# Altium PCB ProPrj_HTXStudio_OneHanded_Keyboard.PcbDoc (part 9 of 11)
Units mm, origin at the board's own origin, x right, y up, seen from the top; angles counter-clockwise.
Board outline 152.4 x 101.6 mm, 20 copper layers (F.Cu, F.Mask, B.Cu, B.Mask, In1.Cu, F.SilkS, In2.Cu, B.SilkS, F.Adhes, B.Adhes, F.Paste, B.Paste, Dwgs.User, Cmts.User, Eco1.User, Eco2.User, Edge.Cuts, Margin, B.CrtYd, F.CrtYd); 269 components, 0 nets, 747 pads, 1168 vias.
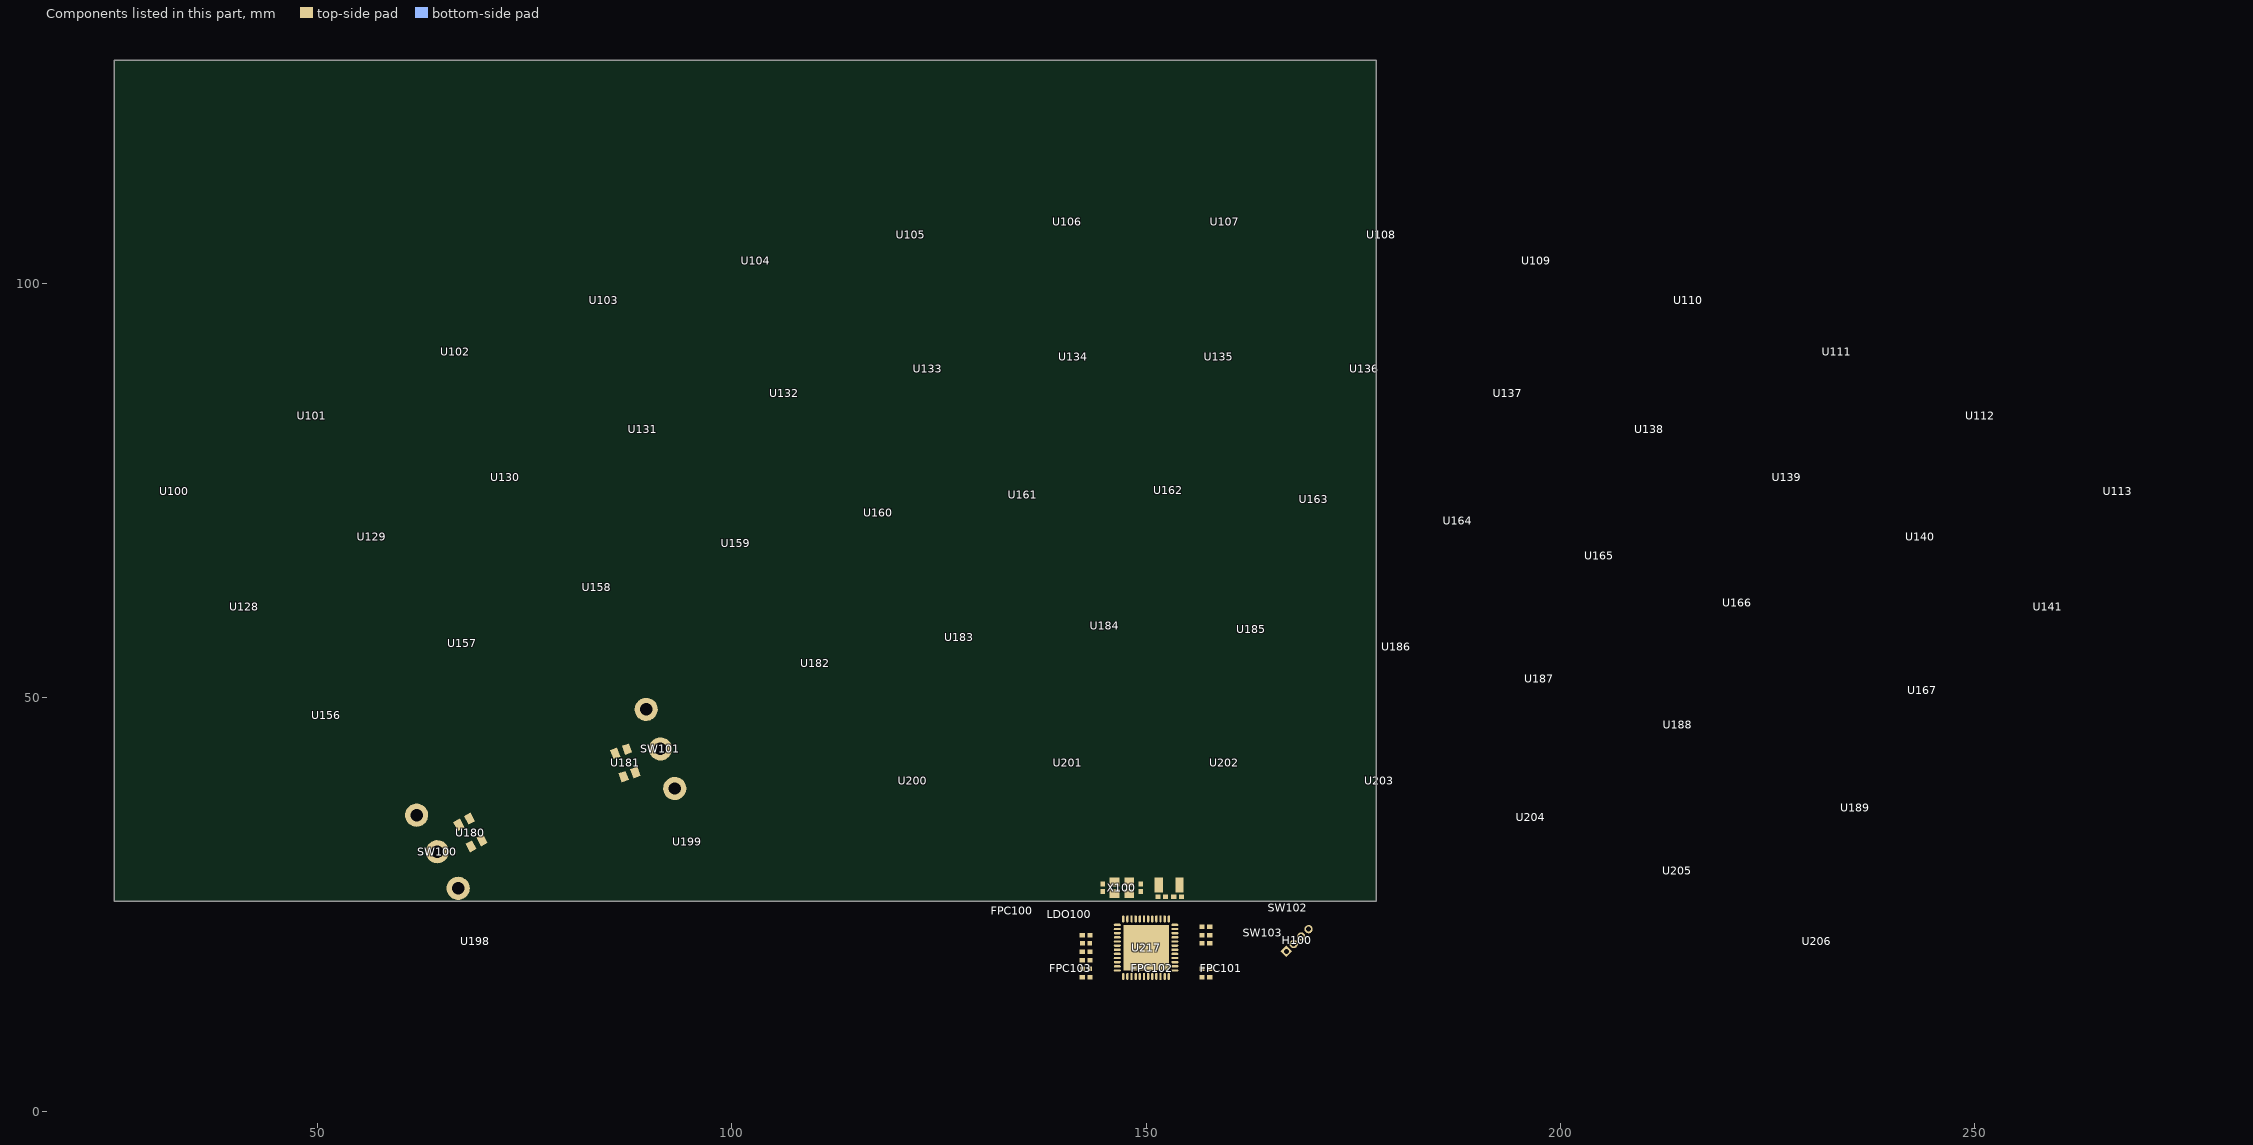
[diagram p21: the components of this part, seen from the top]

## Via types
v1: diameter 0.5, hole 0.3, F.Cu to B.Cu, tented both sides, 1168 vias

## Nets (pads, with @x,y where several pads share a name; then routed paths per layer and width w, separated by ;. In a path a pad name is that pad's centre, name@x,y a point inside that pad or via, vN(x,y) a via of type N, cw(c..) or ccw(c..) an arc to the next point about the centre after c; other vN are vias at no path point) (continued)
copper on no net: | length 15062.5
  F.Cu w0.127: 146.18,26.342 ccw(c147.246,26.342) 147.246,25.276 149.492,25.277 cw(c149.492,24.515) 150.253,24.515 150.253,23.363 ; 147.978,27.767 ccw(c147.978,26.701) 147.225,27.454 147.206,27.436 ccw(c147.512,27.129) 147.079,27.129 147.079,25.964 ccw(c147.513,25.964) 147.206,25.658 ccw(c147.573,26.025) 147.573,25.505 149.492,25.505 cw(c149.492,24.515) 150.126,25.276 ; 150.127,25.276 cw(c149.63,24.771) 150.135,25.268 cw(c149.491,24.514) 150.335,25.035 cw(c148.611,23.763) 150.754,23.763 150.754,23.363 ; 151.253,23.364 151.253,24.022 cw(c151.76,24.022) 151.76,24.529 152.284,24.529 ccw(c152.284,24.989) 152.744,24.989 ccw(c151.25,24.989) 152.361,25.987 151.546,27.387 ; 151.753,23.362 151.753,23.928 cw(c152.118,23.928) 152.118,24.293 152.517,24.293 ccw(c152.517,24.747) 152.971,24.747 cw(c155.504,24.747) 153.269,25.939 154.045,27.385
  F.Cu w0.203: v1(133.256,23.648) 133.256,24.281 133.957,24.982 148.002,24.982 149.255,23.729 149.255,23.363 ; v1(133.934,23.648) 133.934,24.197 134.414,24.677 147.807,24.677 148.755,23.729 148.755,23.363 ; v1(134.613,23.648) 134.601,23.661 134.601,24.101 134.871,24.371 147.653,24.371 148.254,23.771 148.254,23.363 ; v1(139.504,20.249) 139.504,20.622 140.116,21.235 140.116,22.124 141.364,23.372 143.431,23.372 145.738,21.066 146.457,21.066 ; v1(140.202,20.376) 140.202,20.685 140.421,20.905 140.421,21.997 141.49,23.066 143.305,23.066 145.806,20.565 146.457,20.565 ; v1(140.901,20.376) 140.901,20.784 140.727,20.959 140.727,21.871 141.617,22.761 143.179,22.761 145.875,20.065 146.457,20.065 ; v1(141.6,20.249) 141.6,20.595 141.032,21.164 141.032,21.745 141.743,22.456 143.053,22.456 145.944,19.565 146.457,19.565 ; 142.328,17.276 142.328,17.2 143.226,16.302 143.226,16.26 143.904,16.26 145.21,17.565 146.457,17.565 ; 142.328,20.324 142.328,20.398 143.226,21.296 143.226,21.34 143.988,20.578 v1(144.031,20.578) ; v1(142.634,15.244) 143.904,15.244 144.929,16.268 147.254,16.268 ; 143.226,18.292 144.285,18.292 144.559,18.566 146.457,18.566 ; 143.226,19.308 144.285,19.308 144.527,19.065 146.457,19.065 ; v1(143.904,23.724) 143.904,23.33 145.669,21.565 146.457,21.565 ; v1(144.031,17.711) 144.721,17.711 145.075,18.065 146.457,18.065 ; v1(144.666,23.731) 144.666,23 145.6,22.065 146.457,22.065 ; 144.793,26.589 145.584,26.589 cw(c145.584,25.748) 146.18,26.342 ; v1(145.187,23.2) 145.822,22.565 146.457,22.565 ; v1(145.809,23.753) 146.123,24.066 147.527,24.066 147.754,23.839 147.754,23.363 ; v1(146.492,23.363) 147.254,23.363 ; v1@146.866,14.609 146.866,15.03 147.755,15.919 147.755,16.341 ; v1@147.543,14.609 147.543,15.073 148.254,15.784 148.254,16.341 ; 147.978,27.766 ccw(c148.225,27.767) 148.225,27.519 149.365,27.519 ; v1@148.222,14.609 148.222,15.117 148.755,15.649 148.755,16.341 ; v1@148.9,14.609 148.9,15.287 149.254,15.641 149.254,16.341 ; v1@149.578,14.609 149.578,15.33 149.755,15.506 149.755,16.341 ; 149.755,23.363 v1(149.755,24.252) ; 150.253,16.268 150.253,15.751 150.127,15.625 150.127,14.951 150.648,14.43 152.92,14.43 153.352,14.861 157.734,14.861 v1(158.28,15.408) ; 150.754,16.268 150.754,15.819 150.432,15.498 150.432,15.077 150.774,14.736 152.794,14.736 153.225,15.167 157.298,15.167 v1(157.538,15.408) ; v1(151.127,15.252) ccw(c150.822,15.558) 151.254,15.559 151.254,16.268 ; 151.754,16.341 151.754,15.559 ccw(c152.186,15.558) v1(151.881,15.252) ; 152.755,16.268 154.579,16.268 156.223,17.912 160.797,17.912 165.494,22.61 167.281,22.61 168.737,21.153 ; 153.551,17.064 154.944,17.064 156.097,18.217 160.467,18.217 165.494,23.245 168.442,23.245 169.635,22.051 ; 153.551,17.565 155.012,17.565 155.97,18.522 160.137,18.522 162.151,20.537 v1(162.151,25.912) ; 153.551,18.065 155.082,18.065 155.844,18.827 159.807,18.827 161.41,20.431 v1(161.41,25.912) ; 153.551,18.566 155.15,18.566 155.717,19.132 159.477,19.132 160.668,20.324 v1(160.668,25.912) ; 153.551,19.066 153.615,19.003 155.157,19.003 155.591,19.437 158.893,19.437 159.439,19.983 v1(159.439,25.912) ; 153.551,19.566 153.558,19.56 v1(154.948,19.56) ; 153.551,20.064 153.582,20.094 155.309,20.094 155.654,19.749 158.621,19.749 159.017,20.145 159.017,24.388 158.696,24.708 v1(158.696,25.912) ; 153.551,21.065 v1(154.953,21.065) ; 153.551,21.565 154.318,21.565 v1(155.207,22.454)
  F.Cu w0.254: v1(30.239,63.123) 63.894,11.307 ccw(c71.725,16.393) 69.863,7.242 ccw(c71.81,16.813) 75.451,7.751 ccw(c69.135,23.467) 79.449,10.031 ; 33.208,60.409 ccw(c33.959,61.461) 34.398,60.245 ccw(c34.913,59.473) 34.076,59.071 ; 33.632,59.748 cw(c150,-118.869) v1(266.841,59.44) ; v1(35.017,62.564) cw(c150,-118.869) 263.581,63.445 ccw(c266.303,68.59) 271.372,65.729 271.371,65.731 ccw(c262.51,70.347) v1@271.792,74.046 ; v1(35.319,78.363) v1(44.844,81.411) ; 42.121,46.669 ccw(c42.955,47.617) 43.215,46.381 43.215,46.396 ccw(c44.03,45.64) 42.956,45.358 ; 42.569,45.961 cw(c150,-118.87) v1(252.498,49.074) ; v1(43.701,64.52) v1(52.337,66.933) ; v1(45.133,67.846) cw(c150,-118.87) v1(263.202,62.914) ; v1(48.562,51.847) cw(c150,-118.868) 255.761,49.203 ; 50.985,33.006 ccw(c51.61,33.538) 52.028,32.831 ccw(c52.64,32.103) 51.716,31.879 ; 51.386,32.415 cw(c150,-118.869) v1(243.757,35.472) ; v1(52.337,87.38) v1(61.989,89.539) ; v1(52.456,53.241) cw(c150,-118.869) v1(255.597,48.421) ; v1(53.764,51.366) v1(62.751,54.233) ; v1(59.576,72.902) v1(68.212,74.299) ; 59.891,19.276 ccw(c60.56,20.058) 60.908,19.09 60.914,19.078 ccw(c61.31,18.434) 60.592,18.195 ; 60.286,18.686 cw(c150,-118.869) v1(239.559,18.787) ; v1(61.734,40.568) cw(c150,-118.868) 239.568,39.841 ccw(c242.661,45.16) 248.171,42.421 ccw(c240.473,46.137) v1(248.032,50.129) ; v1(63.732,40.83) cw(c150,-118.87) v1(241.074,38.139) ; v1(65.799,36.072) 67.014,34.656 ; v1(69.561,26.255) cw(c150,-118.869) 233.106,24.745 ccw(c235.326,28.734) 239.662,27.308 ccw(c221.079,32.782) v1(240.17,36.072) ; 69.802,32.791 75.006,37.994 cw(c76.802,36.198) 76.802,38.739 79.426,38.739 ccw(c79.426,41.278) 81.222,39.482 84.399,42.66 cw(c85.903,41.155) 85.903,43.283 ; v1(69.99,94.873) v1(79.769,96.143) ; v1(70.625,59.694) v1(78.88,61.345) ; v1(71.768,24.007) v1(90.056,30.23) ; v1(73.436,27.508) cw(c150,-118.867) v1(230.86,25.179) ; v1(75.832,79.76) v1(84.595,80.522) ; v1(81.216,13.643) cw(c150,-118.869) v1(226.997,9.045) ; v1(86.881,65.917) v1(96.533,66.806) ; v1(88.024,100.715) v1(97.803,101.096) ; 88.331,40.969 90.98,40.969 ccw(c90.981,43.509) 92.777,41.713 102.901,51.837 cw(c104.697,50.041) 104.697,52.582 v1(105.804,52.582) ; v1(92.85,85.348) v1(101.619,85.348) ; v1(97.93,35.564) v1(117.742,38.485) ; v1(104.026,71.251) v1(112.916,70.997) ; v1(106.693,105.16) v1(116.218,104.652) ; v1(110.122,89.412) v1(118.708,88.553) ; v1(113.678,56.265) v1(122.822,56.138) ; v1(121.552,74.68) v1(129.934,73.537) ; v1(125.616,42.168) v1(136.411,41.152) ; v1(125.743,108.081) v1(135.268,106.684) ; 126.756,26.947 ccw(c150.004,-118.878) 76.4,9.137 cw(c71.985,16.697) 64.402,12.322 26.175,71.251 cw(c29.192,72.27) 27.445,74.932 cw(c150,-118.868) v1(275.015,73.354) ; v1(127.648,91.825) v1(136.157,90.301) ; v1(131.331,58.805) v1(140.48,57.916) ; v1(136.03,18.292) 135.268,19.054 133.998,19.054 127.327,25.724 ccw(c126.297,24.695) 126.296,26.151 ccw(c155.688,-152.929) 125.628,26.04 ; v1(139.332,76.458) v1(147.587,74.553) ; 143.194,17.276 143.226,17.307 143.226,18.292 ; 143.194,20.324 143.226,20.291 143.226,19.308 ; v1(144.666,43.946) v1(155.334,41.66) ; v1(144.793,109.351) v1(154.064,107.192) ; v1(145.428,93.095) v1(153.937,90.809) ; v1(149.238,60.456) v1(157.747,58.043) ; v1@150.381,26.799 ccw(c149.705,27.785) v1(150.55,26.94) ; 152.255,16.268 152.255,15.655 152.413,15.498 154.572,15.498 155.334,16.26 156.774,16.26 156.774,17.276 156.352,17.276 v1(156.098,17.022) ; v1(156.858,76.458) v1(164.986,74.045) ; v1(163.208,92.714) v1(171.082,89.666) ; v1(163.716,43.438) v1(173.114,40.136) ; v1(164.097,108.97) v1(172.987,105.922) ; v1(167.018,59.567) v1(175.781,56.265) ; v1(174.765,75.188) v1(182.512,71.759) ; v1(180.861,90.809) v1(188.608,87.38) ; v1(182.639,40.898) v1(191.91,36.326) ; v1(182.893,107.065) v1(192.037,103.128) ; v1(184.544,57.027) v1(192.545,52.963) ; v1(192.291,72.14) v1(199.657,67.949) ; v1(198.26,87.634) v1(205.753,83.189) ; v1(200.546,35.31) v1(209.69,30.484) ; v1(201.689,52.709) v1(209.635,47.753) ; v1(201.689,103.382) v1(210.071,98.937) ; v1(209.309,67.441) v1(216.413,62.662) ; v1(215.274,82.661) v1(222.572,77.908) ; v1(218.58,28.96) v1(226.454,22.356) ; v1(218.707,46.74) v1(230.899,38.485) ; v1(220.104,98.429) v1(228.105,93.095) ; v1(225.946,61.472) v1(239.027,52.709) ; v1(231.915,76.585) v1(238.519,71.124) ; v1(238.011,91.698) v1(245.504,85.983) ; v1(247.917,68.965) v1(254.14,63.123) ; v1(255.283,83.57) v1(262.776,76.966) ; 255.76,49.204 ccw(c257.702,54.054) 262.629,52.314 262.627,52.308 ccw(c245.966,57.668) v1@263.281,60.215 ; 79.45,10.031 cw(c150.002,-118.874) 125.628,26.04 ; 79.45,10.031 cw(c150.002,-118.874) 125.628,26.04
  F.Cu w0.305: 68.499,32.049 ccw(c68.633,32.048) 68.538,31.953 68.612,31.88 ccw(c70.144,33.411) 70.144,31.246 75.923,31.246 ccw(c75.923,33.786) 77.719,31.989 v1(79.515,33.786) 81.765,33.786 ccw(c81.765,36.325) 83.561,34.529 86.175,37.144 ccw(c84.379,38.94) 86.92,38.94 86.92,40.46 ; v1(139.09,22.679) 139.09,21.097 138.697,20.705 138.697,17.276 139.205,16.768 141.364,16.768 141.872,17.276 142.328,17.276 ; 143.777,27.503 143.793,27.519 144.793,27.519 145.933,27.519 ccw(c145.933,27.767) 146.18,27.766 ; 147.978,26.343 148.225,26.589 149.365,26.589 150.38,26.589 ; 150.55,25.987 151.44,25.987 ; 154.275,25.987 154.996,25.987 v1(155.207,25.776)
  F.Cu w0.508: v1(144.92,25.531) 144.539,25.531 cw(c144.539,26.293) 144.198,25.611 cw(c144.539,26.292) v1(143.777,26.293) v1(143.777,27.055) 143.777,27.503 v1(143.777,27.817) cw(c144.792,27.817) 144.338,28.725 cw(c144.794,27.814) 144.793,28.832 v1(145.174,28.833) v1(145.936,28.833) v1(146.698,28.833) v1(147.46,28.833) v1(148.222,28.833) v1(148.984,28.833) 149.238,28.833 ; v1(150.381,28.325) v1@150.381,27.935 ; v1(154.699,25.023) 155.207,25.531 v1(155.207,25.776) v1(155.207,26.581) v1(155.207,27.385) v1(155.207,28.189) ccw(c154.572,28.189) 154.572,28.824 v1(154.445,28.824) v1(153.652,28.824) 153.198,28.824 ; 149.238,28.832 cw(c149.238,27.691) 149.702,28.734 cw(c149.239,27.69) 150.237,28.244 cw(c149.235,27.688) v1(150.381,27.69) ; 149.238,28.833 v1(149.746,28.833) 153.19,28.833 cw(c153.19,28.824) 153.198,28.824 ; v1(150.381,27.69) v1@150.381,27.935 ; v1(150.381,27.69) 150.381,26.799 150.381,26.591 150.381,25.879 ccw(c150.55,25.879) v1(150.55,25.71) v1(150.55,26.325) v1(150.55,26.94) 150.55,28.104 cw(c151.276,28.104) 150.571,28.277 cw(c151.27,28.105) v1(151.27,28.824) ; v1@150.381,27.935 cw(c151.272,27.935) 150.456,28.292 cw(c151.27,27.936) v1(151.27,28.824) ; v1(151.27,28.824) v1(152.064,28.824) v1(152.857,28.824) 153.198,28.824
  F.Cu w0.762: 126.759,26.928 v1(135.268,26.928) v1(136.03,26.928) v1(136.792,26.928) v1(137.554,26.928) v1(138.316,26.928)
  B.Cu w0.178: 132.621,25.885 132.621,24.657 132.372,24.408 132.372,22.846 133.49,21.728 133.49,21.475 v1(133.747,21.217) ; 133.121,25.885 133.121,24.653 132.728,24.261 132.728,22.993 133.785,21.937 133.965,21.937 v1(134.216,21.686)
  B.Cu w0.203: v1(136.03,18.292) 137.427,16.895 142.507,16.895 142.51,16.897 153.495,16.897 154.496,17.898 154.496,19.108 v1(154.948,19.56) ; 139.174,18.964 139.174,18.066 v1(139.555,17.685) ; v1(139.504,20.249) 140.173,19.579 140.173,18.964 ; v1(140.202,20.376) 140.202,20.088 140.674,19.617 140.674,18.964 ; v1(140.901,20.376) 140.901,20.024 141.173,19.752 141.173,18.964 ; v1(141.6,20.249) 141.674,20.176 141.674,18.964 ; 142.174,18.964 142.174,17.482 142.452,17.203 153.369,17.203 154.191,18.025 154.191,20.324 154.932,21.065 v1(154.953,21.065) ; v1(143.904,23.724) 143.904,23.143 146.605,20.442 149.374,20.442 149.755,20.061 149.755,18.964 ; v1(144.666,23.731) 144.666,22.813 146.731,20.747 149.5,20.747 150.255,19.993 150.255,18.964 ; v1(145.187,23.2) 145.187,22.723 146.858,21.052 149.627,21.052 150.754,19.924 150.754,18.964 ; v1(145.809,23.753) 146.063,24.007 146.876,24.007 147.079,23.803 147.079,21.975 147.391,21.663 149.879,21.663 151.754,19.787 151.754,18.964 ; v1(146.492,23.363) 146.774,23.08 146.774,21.848 147.264,21.357 149.752,21.357 151.255,19.856 151.255,18.964 ; v1(149.578,14.708) 151.678,14.708 151.905,14.482 160.16,14.482 161.049,15.371 161.049,17.911 160.836,18.124 160.836,18.964 ; v1(149.755,24.252) 160.533,24.252 161.049,24.769 162.087,24.769 162.521,24.335 163.41,25.224 163.866,24.769 164.224,24.769 166.183,26.727 167.321,26.727 ; v1(155.207,22.454) 160.084,22.454 160.362,22.176 161.121,21.417 162.011,21.417 ; 157.335,18.964 157.335,17.179 157.538,16.976 v1(157.538,15.408) ; 157.836,18.964 157.836,17.314 158.28,16.869 v1(158.28,15.408) ; 159.336,18.964 159.336,20.036 v1(160.018,20.719) ; v1(159.782,17.296) 159.835,17.348 159.835,18.964 ; 160.336,18.964 160.336,17.862 160.524,17.673 v1(160.524,17.169)
  B.Cu w0.254: v1(30.239,63.123) cw(c34.56,67.444) 28.842,69.599 cw(c40.994,65.018) 30.625,72.837 ; 34.638,77.021 v1(35.319,78.363) ; v1(35.017,62.564) 35.017,62.191 ccw(c37.556,62.191) 35.76,60.395 36.716,59.44 ccw(c38.07,60.794) 38.071,58.879 39.079,58.878 ; 43.092,63.062 v1(43.701,64.52) ; v1(44.844,81.411) 47.085,82.154 ; v1(48.562,51.847) ccw(c59.098,41.31) 45.987,48.39 ccw(c49.708,46.381) 45.479,46.359 ccw(c46.628,46.364) 46.622,45.215 ccw(c46.647,50.065) 48.949,45.796 ; 51.434,85.988 v1(52.337,87.38) ; v1(52.337,66.933) 54.341,67.536 ; 52.998,49.946 v1(53.764,51.366) ; 58.69,71.37 v1(59.576,72.902) ; v1(61.734,40.568) v1(65.799,36.072) ; v1(61.989,89.539) 64.267,90.061 ; v1(62.751,54.233) 65.215,54.733 ; 66.945,18.546 cw(c64.97,21.218) 64.656,17.91 cw(c64.75,18.893) 63.767,18.799 cw(c68.049,19.207) 65.418,22.609 ccw(c38.893,56.923) v1(69.561,26.255) ; v1(68.212,74.299) 70.275,74.887 ; 68.922,93.517 v1(69.99,94.873) ; 69.643,58.474 v1(70.625,59.694) ; 71.034,22.656 v1(71.768,24.007) ; 74.929,78.343 v1(75.832,79.76) ; v1(78.88,61.345) 81.298,61.702 ; v1(79.769,96.143) 82.051,96.502 ; v1(84.595,80.522) 86.768,80.879 ; 86.047,65.028 v1(86.881,65.917) ; 86.979,99.557 v1(88.024,100.715) ; v1(90.056,30.23) 92.2,30.931 ; 91.695,83.934 v1(92.85,85.348) ; v1(96.533,66.806) 97.946,67.186 ; 96.943,34.264 v1(97.93,35.564) ; v1(97.803,101.096) 100.311,101.432 ; v1(101.619,85.348) 103.704,85.469 ; 102.977,70.067 v1(104.026,71.251) ; 105.476,104.064 v1(106.693,105.16) ; v1(105.804,52.582) ccw(c105.804,58.453) 107.487,52.828 ; 108.87,88.101 v1(110.122,89.412) ; 112.606,55.549 v1(113.678,56.265) ; v1(112.916,70.997) 115.023,71.138 ; v1(116.218,104.652) 118.92,104.818 ; v1(117.742,38.485) 119.228,38.719 ; v1(118.708,88.553) 120.965,88.627 ; 118.822,48.785 v1(118.848,43.358) ; 120.294,73.551 v1(121.552,74.68) ; v1(122.822,56.138) 124.75,56.201 ; 124.288,107.008 v1(125.743,108.081) ; 124.48,41.174 v1(125.616,42.168) ; 126.333,90.817 v1(127.648,91.825) ; v1(129.934,73.537) 132.388,73.527 ; 130.114,58.401 v1(131.331,58.805) ; v1(135.268,106.684) 137.746,106.634 ; v1(135.544,45.688) cw(c307.06,45.686) 135.628,51.053 ; v1(136.157,90.301) 138.429,90.329 ; v1(136.411,41.152) 137.823,41.233 ; 137.856,75.452 v1(139.332,76.458) ; v1(140.48,57.916) 142.263,57.844 ; 143.278,108.367 v1(144.793,109.351) ; 143.327,43.058 v1(144.666,43.946) ; 143.962,92.062 v1(145.428,93.095) ; v1(147.587,74.553) 149.898,74.33 ; 147.819,59.499 v1(149.238,60.456) ; v1(147.88,46.309) ccw(c108.203,85.986) 152.575,51.64 ; v1(153.937,90.809) 155.975,90.563 ; v1(154.064,107.192) 156.659,106.868 ; v1(155.334,41.66) 156.586,41.56 ; 155.518,75.752 v1(156.858,76.458) ; v1(157.747,58.043) 159.852,57.738 ; 161.633,91.827 v1(163.208,92.714) ; 162.264,42.731 v1(163.716,43.438) ; 162.317,108.133 v1(164.097,108.97) ; 164.022,25.836 165.748,27.563 167.653,27.563 168.542,26.674 ; v1(164.986,74.045) 167.408,73.545 ; 165.545,58.835 v1(167.018,59.567) ; 166.183,21.77 166.183,23.679 168.542,26.039 168.542,26.674 ; 169.76,25.963 169.05,26.674 168.542,26.674 ; v1(171.082,89.666) 173.479,89.329 ; v1(172.987,105.922) 175.525,105.519 ; v1(173.114,40.136) 175.258,39.696 ; 173.134,74.451 v1(174.765,75.188) ; v1(175.781,56.265) 177.344,55.886 ; 179.223,90.115 v1(180.861,90.809) ; 181.034,40.196 v1(182.639,40.898) ; 181.268,106.306 v1(182.893,107.065) ; v1(182.512,71.759) 184.776,71.175 ; 183.118,56.412 v1(184.544,57.027) ; v1(188.608,87.38) 190.819,86.634 ; 190.56,71.559 v1(192.291,72.14) ; v1(191.91,36.326) 193.586,35.667 ; v1(192.037,103.128) 194.211,102.597 ; v1(192.545,52.963) 194.566,52.307 ; 196.608,86.937 v1(198.26,87.634) ; 199.381,35.489 v1(200.546,35.31) ; v1(199.657,67.949) 201.857,67.241 ; 200.001,102.9 v1(201.689,103.382) ; 200.362,52.256 v1(201.689,52.709) ; v1(205.753,83.189) 207.871,82.497 ; 207.652,67.1 v1(209.309,67.441) ; v1(209.635,47.753) 211.346,47.034 ; v1(209.69,30.484) 211.318,29.526 ; v1(210.071,98.937) 212.588,98.12 ; 213.666,82.315 v1(215.274,82.661) ; v1(216.413,62.662) 218.511,61.776 ; 217.052,28.674 v1(218.58,28.96) ; 217.109,46.408 v1(218.707,46.74) ; 218.382,97.938 v1(220.104,98.429) ; 218.439,37.295 ccw(c218.413,37.32) 218.449,37.319 ; v1(222.572,77.908) 224.518,76.949 ; 224.27,61.108 v1(225.946,61.472) ; v1(226.454,22.356) 228.213,21.359 ; v1(228.105,93.095) 230.526,92.122 ; 230.277,76.282 v1(231.915,76.585) ; v1(230.899,38.485) 232.858,37.405 ; 236.285,91.455 v1(238.011,91.698) ; 238.487,36.018 v1(240.17,36.072) ; v1(238.519,71.124) 240.643,70.026 ; v1(239.027,52.709) 240.927,51.596 ; v1(245.504,85.983) 247.899,84.644 ; 246.325,68.88 v1(247.917,68.965) ; 246.554,50.203 v1(248.032,50.129) ; 246.655,41 ccw(c246.639,41.017) 246.662,41.017 ; 253.581,83.498 v1(255.283,83.57) ; v1(254.14,63.123) 256.131,61.779 ; 261.432,50.964 ccw(c261.418,50.979) 261.438,50.979 ; 261.698,60.161 v1(263.284,60.202) ; v1(262.776,76.966) 264.585,75.738 ; 266.825,62.914 ccw(c266.825,65.456) 268.621,63.658 ; 269.887,64.923 ccw(c269.872,64.938) 269.893,64.938 ; 270.152,74.121 v1(271.793,74.045)
  B.Cu w0.305: 32.073,59.744 v1(32.271,58.424) ; 40.528,45.785 v1(41.161,44.708) ; 47.433,68.985 v1(48.781,67.441) ; 50.284,32.691 v1(50.305,31.119) 51.572,30.665 ; v1(54.418,53.104) cw(c54.418,50.822) 56.528,51.692 cw(c55.275,51.175) 55.808,49.928 ; 54.689,54.368 v1(57.163,53.471) ; 63.512,76.909 v1(64.855,75.475) ; 65.287,41.56 v1(66.307,40.009) ; v1(67.577,6.862) 68.154,5.428 ; v1(68.72,63.631) 69.52,61.736 ; 80.175,48.578 v1(82.436,47.248) 84.381,46.85 ; 80.198,83.46 v1(81.674,81.919) ; v1(84.214,69.6) 84.915,67.837 ; v1(90.369,19.181) 91.1,17.804 ; v1(95.009,56.138) 95.639,54.216 ; 97.373,88.591 v1(98.808,86.781) ; v1(100.089,74.68) 100.766,72.628 ; v1(103.518,41.533) 104.773,39.937 ; v1(111.138,60.202) 111.55,58.431 ; 114.917,92.267 v1(115.837,90.174) ; v1(114.948,27.436) 115.854,25.985 ; v1(116.168,41.834) ccw(c124.148,41.834) 117.234,37.849 ccw(c118.632,38.655) 119.012,37.087 cw(c148.621,-84.877) 122.949,37.976 cw(c124.307,31.478) 124.727,38.103 ccw(c124.778,38.897) 124.828,39.691 124.742,39.696 ; v1(116.692,78.06) 116.962,76.077 ; v1(120.409,45.597) 120.769,43.644 ; v1(127.521,62.869) 127.777,61.186 ; 132.707,94.462 v1(133.236,92.46) ; 132.987,28.98 v1(133.236,30.357) ; v1(133.109,79.887) 133.391,78.157 ; v1(136.792,47.629) 137.055,45.744 ; v1(144.031,64.139) 144.187,62.459 ; 146.427,90.714 ccw(c145.915,92.576) 147.841,92.713 ccw(c145.366,92.537) v1(147.12,94.292) ; 149.936,78.856 v1(150,80.828) ; v1(150.127,31.5) 150.353,29.955 ; 150.62,95.161 v1(150.889,93.095) ; v1(153.175,48.123) 153.468,46.215 ; v1(160.53,64.017) 160.646,62.24 ; 164.583,41.143 ccw(c164.834,42.291) 166.002,42.421 cw(c185.455,44.576) v1(165.883,44.574) ; 166.482,78.168 v1(166.642,80.141) ; 167.715,28.897 v1(167.895,30.297) ; 168.527,94.359 v1(168.964,92.067) ; 169.847,45.055 v1(170.066,46.74) ; 177.016,60.529 v1(177.178,62.361) ; v1(182.893,78.026) 182.911,76.098 ; 184.833,25.821 v1(184.96,27.359) ; 186.03,42.273 v1(186.214,44.142) ; 186.304,92.06 v1(186.703,89.793) ; 193.164,57.343 v1(193.426,59.283) ; 199.11,72.66 v1(199.285,74.644) ; v1(200.828,37.293) ccw(c202.522,37.293) 201.689,35.818 ccw(c208.633,48.117) 202.959,35.182 cw(c202.582,34.323) 203.086,33.531 cw(c202.062,35.139) 201.267,33.407 ; 201.477,20.769 v1(201.697,22.298) ; 201.856,37.898 v1(202.832,40.136) ; 203.827,88.283 v1(203.88,86.291) ; 208.957,52.705 v1(209.436,54.36) ; 214.965,67.879 v1(215.532,69.6) ; 217.416,13.81 v1(217.436,15.454) ; v1(220.866,80.913) 220.972,83.052 ; 222.238,29.612 v1(222.771,31.363) ; 230.297,43.815 v1(232.169,47.121) ; 230.363,61.788 v1(231.153,63.631) ; v1(237.531,73.842) 237.619,76.405 ; 245.199,54.429 v1(246.051,56.138) ; v1(253.538,66.114) 253.653,68.389
  B.Cu w0.356: 139.779,22.726 140.307,22.726 141.333,23.753 142.507,23.753 ; 148.254,18.964 145.136,18.964 144.031,20.07 v1(144.031,20.578) 144.031,22.229 142.507,23.753 ; v1(156.098,17.022) 155.87,17.25 v1(155.87,20.984) 155.87,21.325 ; 166.183,21.77 166.941,21.012 166.941,19.358 166.791,19.507 163.921,19.507 162.119,19.507 159.788,21.838 156.361,21.838 ; 170.372,25.351 171.122,25.351 171.904,24.569 ; 142.507,23.753 143.396,24.642 147.841,24.642 149.365,23.118 153.048,23.118 154.327,21.838 155.365,21.838 ; 155.364,21.838 cw(c155.357,21.325) 155.87,21.325 ; 155.365,21.838 v1(155.87,21.838) ; 155.87,21.325 cw(c156.383,21.326) 156.361,21.838 ; 155.87,21.325 v1(155.87,21.838) ; v1(155.87,21.838) 156.361,21.838
  B.Cu w0.508: 32.467,63.397 34.08,60.959 ; 35.415,75.738 37.449,77.028 ccw(c35.44,78.924) v1(37.393,80.876) ; 40.921,49.438 42.533,47 ; 42.656,72.537 v1(45.133,67.846) ; 43.869,61.779 45.902,63.069 ccw(c43.418,66.661) 47.638,65.535 ccw(c45.376,66.139) v1(47.032,67.794) ; 48.131,72.593 49.534,70.028 ; 50.709,36.341 52.301,33.889 ; 51.109,58.578 v1(52.456,53.241) ; 52.102,84.644 54.235,85.759 ccw(c52.486,87.91) 55.258,87.887 v1(55.275,89.951) ; 53.61,31.825 61.909,35.816 ; 53.764,48.656 55.808,49.928 ; 55.387,57.975 56.79,55.411 ; 59.049,80.848 v1(61.65,76.206) ; 59.357,70.026 61.492,71.142 ccw(c57.809,75.835) 63.259,73.41 ccw(c61.398,74.238) v1(62.839,75.678) ; 60.976,45.393 v1(63.732,40.83) ; 64.423,31.401 68.491,31.401 cw(c68.49,28.861) 70.286,30.657 v1(73.436,27.508) ; 64.51,80.446 65.693,77.772 ; 66.06,45.152 67.409,42.559 ; 66.305,66.231 v1(68.053,61.191) ; 68.614,9.074 70.182,6.606 ; 69.474,92.122 71.694,93.055 ccw(c67.709,97.306) v1(73.536,97.306) ; 70.282,57.117 72.438,58.187 73.144,58.893 ccw(c71.348,60.689) 73.888,60.689 v1(73.888,62.563) ; 70.517,65.272 71.7,62.599 ; 71.787,21.359 73.844,22.611 ccw(c72.619,25.09) 75.324,24.514 ccw(c72.651,25.084) v1(74.584,27.016) ; v1(74.022,44.956) v1(79.515,33.786) ; 75.482,76.949 77.702,77.881 ccw(c74.491,82.895) 79.769,80.14 ccw(c78.136,80.993) v1(79.438,82.295) ; 76.079,87.758 v1(78.169,82.874) ; 77.148,53.177 v1(78.804,48.095) ; 78.968,18.025 v1(81.216,13.643) ; 81.271,52.084 82.379,49.379 ; 81.488,86.9 82.443,84.138 ; 82.087,72.585 v1(83.705,67.522) ; 86.204,71.277 87.16,68.514 ; 86.56,63.618 88.805,64.488 90.429,66.113 ccw(c88.633,67.909) 91.174,67.909 v1(91.174,68.881) ; 86.587,47.645 89.64,48.594 ; 87.412,98.12 89.702,98.864 ccw(c88.311,103.199) v1(92.863,103.199) ; 91.362,43.815 91.906,43.815 cw(c91.905,41.275) 93.702,43.072 v1(98.638,38.135) ; 92.129,82.497 94.419,83.241 ccw(c93.603,87.09) 96.914,84.966 ccw(c95.187,86.074) v1(96.638,87.524) ; 92.19,21.313 93.303,18.61 ; 93.041,59.071 v1(93.928,53.763) ; 93.629,93.219 v1(95.435,88.212) ; 97.047,57.61 97.906,54.815 ; 97.458,32.856 99.701,33.73 ccw(c95.519,44.3) 101.359,34.547 ccw(c100.418,36.119) 102.248,36.198 cw(c149.325,38.246) v1(102.203,38.247) ; 98.346,77.596 v1(98.834,72.23) ; 98.946,91.912 99.667,89.079 ; 102.339,75.949 103.06,73.116 ; 103.36,68.616 105.675,69.28 ccw(c105.638,71.249) 107.455,70.488 ccw(c100.612,73.353) v1(108.031,73.353) ; 103.947,28.32 v1(105.441,23.627) ; 105.789,102.597 108.132,103.146 ccw(c107.584,107.207) v1(111.681,107.207) ; 106.288,43.285 107.059,40.465 ; 109.182,86.634 111.525,87.183 ccw(c111.399,89.839) 113.932,89.03 ccw(c106.924,91.266) v1(114.28,91.265) ; 109.402,63.501 v1(109.738,58.12) ; 111.574,97.192 v1(113.011,92.062) ; 112.944,54.088 115.278,54.678 ccw(c115.277,56.561) 116.98,55.756 ccw(c113.877,57.223) v1(116.987,58.674) ; 113.26,61.683 113.862,58.822 ; 114.967,81.23 v1(115.536,75.936) ; 116.762,95.444 117.244,92.561 ; 117.539,29.25 118.164,26.394 ; 118.808,79.254 119.289,76.371 ; 118.822,48.785 cw(c118.756,48.721) 118.848,48.721 v1(118.848,43.358) ; 120.545,72.072 122.91,72.523 ccw(c122.029,76.414) v1(126.019,76.414) ; 122.61,46.824 123.096,43.942 ; 124.475,105.519 126.858,105.871 ccw(c126.801,109.603) v1(130.534,109.603) ; 124.742,39.696 127.103,40.166 ; 126.098,66.43 v1(126.105,61.061) ; 126.521,89.329 128.903,89.68 ccw(c128.47,92.614) 130.823,90.809 ccw(c127.276,93.529) v1(131.746,93.528) ; 129.776,64.269 130.116,61.366 ; 129.788,99.65 v1(130.486,94.389) ; 130.304,56.913 132.129,57.185 ; 130.34,34.098 v1(130.771,29.188) ; v1(131.788,78.121) 131.834,83.459 ; 132.686,57.268 132.129,57.185 ; 134.812,97.474 135.051,94.56 ; 135.042,32.026 135.329,29.117 ; 135.496,81.169 135.734,78.256 ; v1(135.544,45.688) 135.544,50.85 cw(c135.831,50.85) 135.628,51.053 ; v1(136.647,61.223) cw(c132.808,60.63) 136.641,59.994 cw(c134.477,60.353) 136.03,58.804 cw(c132.128,62.697) 132.692,57.214 cw(c132.131,62.616) 132.129,57.185 ; 137.971,73.956 140.367,74.19 ccw(c139.64,77.767) v1(143.29,77.767) ; v1(139.09,22.679) 139.732,22.679 139.779,22.726 ; 139.201,48.726 139.399,45.809 ; v1(142.66,62.493) 142.99,67.834 ; 143.341,106.868 145.744,107.019 ccw(c146.002,111.074) 148.603,107.953 ccw(c146.536,110.432) v1(149.763,110.431) ; 143.414,41.56 145.814,41.751 ccw(c146.397,45.036) 148.984,42.929 ccw(c146.01,45.351) v1(149.845,45.351) ; 144.024,90.563 146.427,90.714 ; 146.457,65.349 146.533,62.426 ; 147.86,58 150.266,58.117 ccw(c150.056,61.698) v1(153.642,61.698) ; v1(147.88,46.309) 152.575,51.64 ; 148.144,100.575 v1(148.155,95.272) ; 148.321,35.348 v1(148.662,30.425) ; v1(148.487,78.955) 148.828,84.27 ; 152.279,78.758 152.285,81.681 ; 152.695,29.818 152.749,32.741 ; 152.963,95.063 152.969,97.986 ; 155.497,74.252 157.905,74.269 ccw(c157.868,77.564) v1(161.164,77.564) ; 155.807,46.048 155.901,48.969 ; v1(159.052,62.415) 159.941,67.701 ; 161.57,90.329 163.978,90.278 ccw(c163.779,95.165) 166.002,90.808 ccw(c164.59,93.575) v1(167.696,93.575) ; 162.177,41.233 164.583,41.143 ; 162.254,106.634 164.661,106.583 ccw(c164.731,114.138) 167.018,106.937 ccw(c166.159,109.643) v1(168.998,109.643) ; 162.978,61.994 163.167,64.912 ; v1(165.034,78.389) 165.83,83.656 ; v1(165.293,29.646) 166.325,34.49 ; 165.438,57.338 167.842,57.216 ccw(c167.905,57.216) 167.905,57.153 168.542,57.154 ccw(c168.542,58.111) 169.499,58.111 v1(169.5,60.661) ; v1(166.416,94.65) 166.513,99.961 ; v1(168.034,45.335) 169.497,50.541 ; 168.808,77.874 169.059,80.786 ; 170.024,28.488 170.419,31.385 ; 170.853,94.065 171.104,96.977 ; 172.158,44.655 172.541,47.554 ; 172.978,72.959 175.376,72.757 ccw(c175.815,76.001) 177.432,73.156 ccw(c175.962,75.742) v1(178.937,75.742) ; v1(175.579,60.83) 176.809,66.032 ; 179.035,88.627 181.429,88.375 ccw(c181.817,92.788) 184.163,89.03 ccw(c182.717,91.344) v1(185.445,91.344) ; 179.316,60.074 179.77,62.962 ; 180.773,38.719 183.152,38.348 ccw(c183.761,39.636) 185.179,39.5 ccw(c164.07,41.521) v1(185.275,41.523) ; 181.08,104.818 183.475,104.566 ccw(c183.48,115.595) 186.195,104.905 ccw(c185.598,107.257) v1(188.024,107.257) ; v1(181.336,76.464) 182.721,81.621 ; v1(181.354,27.102) 184.105,31.538 ; 182.862,54.933 185.243,54.573 ccw(c182.015,104.143) 187.211,54.741 ccw(c186.937,57.335) v1(189.546,57.334) ; v1(184.208,92.53) 184.767,97.811 ; v1(184.299,42.722) 186.227,47.767 ; 185.205,75.61 185.699,78.491 ; 187.079,25.146 187.809,27.976 ; 188.289,41.646 188.958,44.492 ; 188.598,91.573 189.092,94.454 ; 190.268,70.088 192.64,69.669 ccw(c192.141,85.172) 194.577,69.853 ccw(c194.192,72.273) v1(196.642,72.273) ; v1(191.838,57.754) 193.457,62.841 ; 195.414,56.68 196.127,59.515 ; 196.296,85.469 198.661,85.018 ccw(c199.365,89.022) 201.562,85.602 ccw(c200.218,87.694) v1(202.704,87.694) ; v1(197.677,73.13) 199.383,78.179 ; v1(198.696,22.267) 201.42,26.532 ; 198.948,34.053 201.267,33.407 ; 199.689,101.432 202.054,100.981 ccw(c203.044,107.457) 204.61,101.095 ccw(c204.046,103.386) v1(206.405,103.386) ; 199.962,50.81 202.295,50.215 ccw(c203.515,54.572) 204.991,50.295 ccw(c204.196,52.598) v1(206.632,52.598) ; v1(200.612,38.378) 202.598,43.345 ; 201.355,71.983 202.088,74.812 ; v1(201.431,89.013) 202.776,94.142 ; 203.628,19.836 204.684,22.562 ; 204.043,37.05 204.99,39.815 ; 206.072,87.605 206.805,90.435 ; 207.229,65.66 209.552,65.028 ccw(c210.575,68.344) 211.595,65.027 ccw(c210.865,67.403) v1(213.351,67.403) ; v1(207.409,53.324) 209.747,58.155 ; v1(209.915,35.074) 215.166,35.074 ccw(c215.166,37.614) 216.962,35.818 218.438,37.295 ; 211.137,51.842 212.105,54.601 ; v1(212.881,68.702) 215.698,73.356 ; 213.232,80.879 215.551,80.231 ccw(c216.217,86.384) 218.199,80.521 ccw(c217.497,82.598) v1(219.689,82.598) ; v1(215.651,15.223) 218.034,19.54 ; 216.456,27.298 218.683,26.386 ccw(c219.51,27.632) 220.993,27.435 ccw(c208.027,29.162) v1(221.108,29.164) ; 216.567,45.009 218.829,44.185 ccw(c221.925,51.153) 220.358,43.691 ccw(c220.888,46.215) 222.644,44.326 ccw(c182.466,87.506) v1(224.165,45.793) ; 217.145,67.015 218.113,69.774 ; 217.949,96.502 220.268,95.854 ccw(c219.977,102.747) v1(224.855,97.869) ; v1(218.342,84.082) 220.415,88.979 ; 219.444,12.632 220.811,15.216 ; v1(223.077,47.281) 225.545,52.011 ; 223.153,82.189 224.12,84.948 ; 223.718,59.714 225.974,58.874 ccw(c227.041,60.595) 228.359,59.059 ccw(c226.541,61.178) v1(229.334,61.178) ; 224.292,28.481 225.599,31.095 ; v1(226.997,9.045) 233.717,10.657 ; v1(228.449,62.742) 231.553,67.185 ; 229.725,74.887 231.981,74.048 ccw(c233.479,77.915) 234.582,73.917 ccw(c233.983,76.09) v1(236.236,76.09) ; v1(230.86,25.179) 235.901,25.179 ccw(c235.901,27.719) 237.697,25.923 238.606,26.833 ; 232.35,42.681 233.661,45.294 ; 232.464,60.745 233.658,63.413 ; 233.055,18.546 235.162,17.38 ccw(c236.371,19.489) 237.376,17.275 ccw(c234.31,24.036) v1(239.559,18.787) ; v1(234.708,77.815) 237.561,82.358 ; 235.733,90.061 237.989,89.221 ccw(c238.666,94.895) v1(242.706,90.855) ; 237.763,34.705 239.896,33.587 ccw(c241.29,35.999) 242.583,33.531 ccw(c241.566,35.472) v1(243.757,35.472) ; 239.72,75.363 240.915,78.031 ; v1(241.074,38.139) 242.742,38.139 ccw(c242.742,40.681) 244.539,38.883 246.656,41 ccw(c246.639,41.017) 246.662,41.017 ; v1(243.473,55.486) 246.835,59.708 ; 245.659,67.536 247.836,66.511 ccw(c249.022,70.926) 250.711,66.678 ccw(c250.03,68.393) v1(251.875,68.393) ; 245.829,48.889 247.96,47.77 ccw(c249.05,52.522) v1(252.498,49.074) ; 247.204,53.215 248.618,55.773 ; v1(251.152,69.885) 254.092,74.325 ; 252.915,82.154 255.093,81.129 ccw(c256.871,85.566) v1(260.252,82.186) ; v1(255.597,48.421) 257.838,48.421 ccw(c257.838,50.961) 259.634,49.165 261.432,50.964 ; 255.659,67.174 257.072,69.732 ; 260.921,58.878 263.005,57.674 ccw(c264.468,59.84) 265.697,57.534 ccw(c264.681,59.44) v1(266.841,59.44) ; v1(263.202,62.914) 266.816,62.914 ccw(c266.816,65.456) 268.612,63.658 269.893,64.938 ; 269.375,72.837 271.46,71.633 ccw(c272.765,73.829) 273.825,71.504 ccw(c272.982,73.354) v1(275.015,73.354)
  In1.Cu w0.305: v1(130.486,94.389) ccw(c149.668,94.39) 131.077,89.665 cw(c106.832,83.5) 131.839,82.807 131.839,80.141 cw(c130.442,80.141) 130.442,78.744 127.775,78.744 ccw(c127.775,77.727) 126.759,77.727 126.759,62.107 ccw(c127.775,62.107) 127.775,61.09 134.633,61.091 cw(c134.633,60.074) 135.649,60.074 135.649,47.883 cw(c134.252,47.883) 134.252,46.486 132.347,46.486 ccw(c132.347,45.469) 131.331,45.469 131.331,22.356 ccw(c133.784,22.355) 132.05,20.621 136.175,16.495 ccw(c137.971,18.292) 137.971,15.751 142.126,15.752 cw(c142.126,15.243) v1(142.634,15.244) ; v1(135.544,45.688) 132.947,45.688 ccw(c132.947,44.708) 131.966,44.707 131.966,22.264 ccw(c133.892,22.264) 132.53,20.902 136.446,16.986 ccw(c138.201,18.742) 138.201,16.259 146.19,16.26 cw(c146.19,15.584) 146.866,15.584 146.866,14.609 ; 147.543,14.609 147.543,15.962 cw(c148.476,15.962) 148.476,16.894 154.414,16.895 ccw(c154.414,18.195) 155.334,17.275 155.483,17.424 cw(c156.35,16.557) 156.35,17.783 157.155,17.784 ccw(c157.156,19.518) 158.382,18.291 164.55,24.459 ccw(c162.752,26.256) 165.294,26.255 v1(165.293,29.646) ; 148.222,14.609 148.222,15.879 cw(c148.73,15.878) 148.73,16.386 156.214,16.387 ccw(c156.214,18.555) 157.747,17.022 165.639,24.913 ccw(c163.843,26.709) 166.383,26.709 166.383,40.136 cw(c167.78,40.135) 167.78,41.532 169.558,41.533 ccw(c169.558,42.676) 170.701,42.675 170.701,62.361 cw(c171.971,62.361) 171.971,63.63 176.543,63.631 ccw(c176.543,64.9) 177.813,64.9 177.813,69.854 cw(c178.829,69.853) 178.829,70.87 179.972,70.87 ccw(c179.972,72.233) 181.336,72.233 v1(181.336,76.464) ; 148.9,14.609 148.9,15.287 cw(c149.492,15.287) 149.492,15.879 156.52,15.879 ccw(c156.521,17.613) 157.747,16.386 166.274,24.913 ccw(c164.478,26.709) 167.018,26.709 167.018,39.882 cw(c168.034,39.881) 168.034,40.898 169.939,40.898 ccw(c169.939,42.295) 171.336,42.294 171.336,59.44 cw(c172.726,59.44) 172.726,60.83 v1(175.579,60.83)
  F.SilkS w0.254: 21.522,71.608 cw(c23.204,72.888) 22.023,74.64 cw(c150,-118.868) 277.986,74.634 cw(c276.796,72.888) 278.479,71.608 232.268,3.098 cw(c231.103,3.876) 230.249,2.766 ccw(c150.001,-118.865) 174.072,24.851 163.005,13.783 137.005,13.783 125.935,24.852 ccw(c150,-118.868) 69.751,2.766 cw(c68.897,3.875) 67.732,3.098 21.521,71.608
  In2.Cu w0.155: v1(133.747,21.217) 133.987,20.979 134.232,20.979 136.919,18.292 150.918,18.292 151.331,17.878 151.331,16.034 151.127,15.83 v1(151.127,15.252) ; v1(134.216,21.686) 134.506,21.395 134.506,21.213 137.071,18.647 151.065,18.647 151.687,18.025 151.687,16.005 151.881,15.811 v1(151.881,15.252)
  In2.Cu w0.254: v1(133.256,23.648) 133.256,23.4 137.653,19.003 157.04,19.003 159.403,16.641 160.16,16.641 160.524,17.005 v1(160.524,17.169) ; v1(133.934,23.648) 133.934,23.226 137.801,19.359 153.862,19.359 154.597,20.094 156.452,20.094 159.251,17.296 v1(159.782,17.296) ; v1(134.613,23.648) 134.613,23.051 137.948,19.715 153.583,19.715 154.318,20.451 159.75,20.451 v1(160.018,20.719) ; v1(139.555,17.685) 139.555,16.672 139.84,16.387 143.619,16.387 144.635,15.37 149.007,15.37 149.578,14.798 149.578,14.736
  In2.Cu w0.305: v1(32.271,58.424) v1(41.161,44.708) v1(50.305,31.119) v1(67.577,6.862) ccw(c70.117,9.401) 70.625,5.845 ccw(c68.688,19.411) 73.436,6.557 cw(c150,-118.869) 130.7,26.806 131.005,26.806 cw(c131.005,24.555) 133.256,24.555 v1(133.256,23.648) ; v1(48.781,67.441) 48.781,63.123 ccw(c50.813,63.122) 50.813,61.09 53.988,61.091 cw(c53.988,59.185) 55.893,59.185 55.893,54.741 ccw(c57.163,54.74) v1(57.163,53.471) 61.1,53.471 cw(c61.1,52.201) 62.37,52.2 62.37,41.279 ccw(c63.64,41.278) 63.64,40.009 v1(66.307,40.009) 68.466,40.009 cw(c68.466,38.485) 69.99,38.484 69.99,30.738 ccw(c71.768,30.737) 71.768,28.959 77.61,28.96 cw(c77.61,27.436) 79.134,27.435 79.134,14.609 ccw(c81.039,14.609) 81.039,12.703 ccw(c81.039,23.914) 85.779,13.755 ; v1(64.855,75.475) 64.855,70.416 ccw(c66.18,70.416) 66.18,69.091 67.577,69.092 cw(c67.577,67.948) 68.72,67.948 v1(68.72,63.631) 68.72,62.742 ccw(c69.99,62.741) 69.99,61.472 76.467,61.472 cw(c76.467,60.074) 77.864,60.074 77.864,48.391 ccw(c79.007,48.391) 79.007,47.248 v1(82.436,47.248) 85.992,47.248 cw(c85.992,45.978) 87.262,45.977 87.262,20.451 ccw(c88.532,20.45) 88.532,19.181 v1(90.369,19.181) ccw(c90.369,59.398) 102.705,21.119 cw(c149.992,-118.84) 129.147,27.414 cw(c150.281,-120.927) 132.659,27.871 132.964,27.871 cw(c132.964,26.222) 134.613,26.222 v1(134.613,23.648) ; v1(81.674,81.919) v1(84.214,69.6) ccw(c86.754,69.6) 86.754,67.06 90.564,67.06 cw(c90.564,64.901) 92.723,64.9 92.723,58.424 ccw(c95.009,58.424) v1(95.009,56.138) 96.406,56.138 cw(c96.406,54.614) 97.93,54.613 97.93,43.057 ccw(c99.454,43.056) 99.454,41.532 v1(103.518,41.533) 104.788,41.533 cw(c104.788,40.263) 106.058,40.262 106.058,31.627 ccw(c107.582,31.626) 107.582,30.102 113.678,30.103 cw(c113.678,28.833) 114.948,28.832 v1(114.948,27.436) ccw(c116.447,27.289) 115.837,25.911 ccw(c117.031,28.607) 117.675,25.73 cw(c150.001,-118.876) 134.456,28.481 137.266,28.482 cw(c137.267,26.036) 139.713,26.035 139.713,22.102 139.504,21.892 v1(139.504,20.249) ; v1(98.808,86.781) v1(100.089,74.68) 100.089,72.648 cw(c98.565,72.647) 98.565,71.123 95.771,71.124 ccw(c95.771,69.6) 94.247,69.599 94.247,59.186 ccw(c96.025,59.185) 96.025,57.407 96.914,57.408 cw(c96.914,55.376) 98.946,55.376 98.946,44.073 ccw(c100.47,44.072) 100.47,42.548 105.423,42.549 cw(c105.423,41.025) 106.947,41.024 106.947,35.183 ccw(c108.217,35.182) 108.217,33.913 114.567,33.913 cw(c114.567,32.389) 116.091,32.388 116.091,27.563 ccw(c117.361,27.562) 117.361,26.293 ccw(c117.358,35.509) 119.36,26.513 ; v1(115.837,90.174) v1(116.692,78.06) 116.692,76.169 cw(c115.329,76.169) 115.329,74.806 112.408,74.807 ccw(c112.408,73.537) 111.138,73.536 v1(111.138,60.202) 111.138,59.694 ccw(c113.678,59.694) 113.678,57.154 118.123,57.154 cw(c118.123,54.867) 120.409,54.867 v1(120.409,45.597) 120.409,45.089 ccw(c122.441,45.088) 122.441,43.056 130.823,43.057 cw(c130.823,40.644) 133.236,40.643 v1(133.236,30.357) ccw(c134.199,30.356) 134.199,29.393 135.377,29.393 138.496,29.393 cw(c138.496,26.989) 140.901,26.989 v1(140.901,20.376) ; 123.434,27.311 ccw(c150.241,-120.145) 119.36,26.512 ; v1(133.236,92.46) cw(c-489.116,92.459) v1(133.109,79.887) 133.109,78.49 cw(c131.458,78.49) 131.458,76.839 129.172,76.839 ccw(c129.172,75.187) 127.521,75.187 v1(127.521,62.869) 127.521,62.234 ccw(c129.045,62.233) 129.045,60.709 135.014,60.71 cw(c135.014,58.932) 136.792,58.931 v1(136.792,47.629) 136.792,44.327 cw(c135.395,44.327) 135.395,42.93 ccw(c135.395,41.532) 133.998,41.532 133.998,31.881 ccw(c136.03,31.88) 136.03,29.848 139.111,29.849 cw(c139.111,27.36) 141.6,27.36 v1(141.6,20.249) ; v1(133.934,23.648) 133.934,25.352 ccw(c131.948,25.352) 131.948,27.338 131.644,27.338 ccw(c149.945,-118.502) 127.045,26.687 ccw(c150.008,-118.888) 86.05,13.885 ; v1(140.202,20.376) 140.202,26.619 ccw(c137.881,26.619) 137.882,28.94 134.936,28.94 ccw(c150.001,-118.877) 119.36,26.513 ; v1(144.031,17.711) 144.031,16.514 144.793,15.752 149.619,15.752 150.762,14.609 159.906,14.609 161.2,15.902 161.2,20.68 160.053,21.828 160.053,26.114 cw(c162.593,26.114) 162.593,28.654 163.814,28.654 cw(c150.007,-118.813) 179.927,26.245 ; v1(150.889,93.095) v1(150,80.828) 150,78.617 cw(c148.603,78.617) 148.603,77.22 145.555,77.22 ccw(c145.555,75.696) 144.031,75.695 v1(144.031,64.139) 144.031,63.758 ccw(c145.428,63.758) 145.428,62.361 151.524,62.361 cw(c151.524,60.709) 153.175,60.709 v1(153.175,48.123) 153.175,43.946 cw(c151.905,43.945) 151.905,42.676 151.27,42.676 ccw(c151.27,41.532) 150.127,41.532 v1(150.127,31.5) ccw(c151.143,31.5) 151.143,30.483 157.112,30.484 cw(c157.112,29.467) 158.128,29.467 158.128,24.261 157.366,23.499 155.08,23.499 154.318,22.737 154.318,21.7 v1(154.953,21.065) ; v1(158.696,25.912) 158.696,29.214 cw(c161.363,29.214) 161.364,31.881 165.998,31.881 ccw(c165.998,33.027) 167.145,33.027 167.145,43.946 ccw(c165.621,43.946) 165.621,45.47 155.969,45.47 cw(c155.969,46.739) 154.699,46.739 154.699,60.202 cw(c155.842,60.201) 155.842,61.344 159.271,61.345 ccw(c159.271,62.604) 160.53,62.604 v1(160.53,64.017) ccw(c160.53,64.028) 160.541,64.028 160.541,78.744 cw(c161.938,78.743) 161.938,80.14 v1(166.642,80.141) 167.78,80.141 ccw(c167.78,81.325) 168.964,81.324 v1(168.964,92.067) ; v1(159.439,25.912) 159.439,26.554 cw(c161.979,26.554) 161.978,29.094 163.472,29.094 ccw(c166.764,69.304) 166.764,28.959 ccw(c166.764,30.09) 167.895,30.09 v1(167.895,30.297) ccw(c167.895,30.309) 167.907,30.309 167.907,33.151 cw(c168.923,33.15) 168.923,34.167 169.05,34.167 ccw(c169.05,35.183) 170.066,35.182 v1(170.066,46.74) 170.066,53.979 cw(c171.336,53.979) 171.336,55.248 175.781,55.249 ccw(c175.781,56.646) 177.178,56.645 v1(177.178,62.361) 177.178,72.521 cw(c178.575,72.52) 178.575,73.917 181.75,73.918 ccw(c181.75,75.061) 182.893,75.06 v1(182.893,78.026) 182.893,84.586 cw(c184.163,84.586) 184.163,85.855 185.306,85.856 ccw(c185.306,87.253) 186.703,87.252 v1(186.703,89.793) ; v1(160.668,25.912) cw(c162.953,25.912) 162.953,28.196 164.322,28.196 cw(c150.005,-118.845) 187.683,24.006 cw(c151.397,-113.67) 188.578,23.767 188.604,23.76 cw(c148.573,-124.092) 189.067,23.634 ccw(c194.577,46.882) 194.577,22.99 201.054,22.991 ccw(c201.054,24.768) 202.832,24.768 v1(202.832,40.136) 202.832,52.963 cw(c204.229,52.962) 204.229,54.359 v1(209.436,54.36) 210.579,54.36 ccw(c210.579,55.757) 211.976,55.756 211.976,61.599 cw(c213.373,61.598) 213.373,62.995 214.135,62.996 ccw(c214.135,64.393) 215.532,64.392 v1(215.532,69.6) 215.532,75.188 cw(c217.183,75.187) 217.183,76.838 219.723,76.839 ccw(c219.723,77.982) 220.866,77.981 v1(220.866,80.913) ; v1(161.41,25.912) cw(c163.135,26.017) 163.116,27.745 164.757,27.745 cw(c150.005,-118.834) 188.484,23.371 cw(c188.419,23.118) 188.498,23.368 cw(c149.941,-119.075) 196.636,20.911 ccw(c197.436,23.311) 199.022,21.339 cw(c201.744,17.955) v1(201.697,22.298) cw(c201.754,22.299) 201.754,22.355 203.086,22.356 ccw(c203.086,23.499) 204.229,23.498 204.229,30.738 cw(c206.007,30.738) 206.007,32.516 217.818,32.516 ccw(c217.818,34.167) 219.469,34.166 219.469,41.787 cw(c220.993,41.787) 220.993,43.311 229.629,43.311 ccw(c229.629,44.834) 231.153,44.834 v1(231.153,63.631) 231.153,67.568 cw(c232.677,67.568) 232.677,69.092 235.852,69.092 ccw(c235.852,70.77) 237.53,70.77 v1(237.531,73.842) ; v1(162.151,25.912) cw(c163.315,26.109) 163.274,27.288 165.226,27.288 cw(c150.002,-118.86) 212.009,14.354 ccw(c214.151,18.957) 216.548,14.481 ccw(c215.614,16.226) v1(217.436,15.454) ; 179.253,26.382 cw(c155.072,-94.129) 179.926,26.245 ; v1(203.88,86.291) 203.88,83.094 cw(c202.451,83.094) 202.451,81.665 200.419,81.665 ccw(c200.419,80.521) 199.276,80.521 199.276,74.653 ccw(c199.285,74.653) v1(199.285,74.644) 199.285,70.116 cw(c198.006,70.116) 198.006,68.837 194.704,68.838 ccw(c194.704,67.568) 193.434,67.567 193.434,59.29 cw(c193.426,59.29) v1(193.426,59.283) 193.426,53.336 cw(c191.91,53.336) 191.91,51.819 187.719,51.82 ccw(c187.719,50.296) 186.195,50.295 186.195,44.161 ccw(c186.214,44.161) v1(186.214,44.142) 186.214,28.612 cw(c184.961,28.612) v1(184.96,27.359) cw(c179.927,38.186) 179.927,26.245 ; 217.437,15.455 217.437,18.673 cw(c218.707,18.673) 218.707,19.942 221.374,19.943 ccw(c221.374,21.34) 222.771,21.339 v1(222.771,31.363) 222.771,40.263 cw(c224.041,40.263) 224.041,41.532 230.899,41.533 ccw(c230.899,42.802) 232.169,42.802 v1(232.169,47.121) 232.169,54.868 cw(c233.439,54.868) 233.439,56.137 v1(246.051,56.138) 246.647,56.138 ccw(c246.647,57.407) 247.917,57.407 247.917,61.853 cw(c249.187,61.853) 249.187,63.122 252.108,63.123 ccw(c252.108,64.552) 253.538,64.552 v1(253.538,66.114) ; 85.779,13.755 cw(c105.54,-26.934) 86.05,13.886 ; 85.779,13.755 ccw(c80.04,26.021) 86.05,13.885
  B.SilkS w0.254: 21.522,71.608 cw(c23.204,72.888) 22.023,74.64 cw(c150,-118.868) 277.986,74.634 cw(c276.796,72.888) 278.479,71.608 232.268,3.098 cw(c231.103,3.876) 230.249,2.766 ccw(c150.001,-118.865) 174.072,24.851 163.005,13.783 137.005,13.783 125.935,24.852 ccw(c150,-118.868) 69.751,2.766 cw(c68.897,3.875) 67.732,3.098 21.521,71.608
  Dwgs.User w0.254: 58.754,18.954 cw(c149.999,-118.867) 104.508,40.038 ; 58.754,18.954 cw(c149.999,-118.867) 104.508,40.038 ; 58.754,18.954 50.253,31.796 cw(c149.994,-118.858) 100.268,54.844 104.507,40.039 ; 79.938,28.127 81.048,25.093 80.272,24.81 81.234,22.181 82.01,22.465 84.165,16.577 85.784,17.17 86.121,16.248 89.219,17.383 88.882,18.304 90.503,18.897 88.968,23.093 90.399,23.617 92.013,19.204 105.161,24.015 103.546,28.428 104.979,28.953 106.515,24.756 108.135,25.349 108.472,24.428 111.57,25.561 111.233,26.483 112.853,27.075 110.698,32.964 111.474,33.248 110.512,35.876 109.736,35.592 108.626,38.625 107.006,38.032 106.69,38.897 103.592,37.763 103.908,36.899 102.288,36.306 103.399,33.272 101.965,32.748 100.35,37.162 87.203,32.351 88.818,27.937 87.387,27.413 86.277,30.447 84.656,29.853 84.34,30.718 81.242,29.585 81.558,28.72 79.938,28.127